# Altium PCB caton-d-q100.PcbDoc
Units mm, origin at the board's own origin, x right, y up, seen from the top; angles counter-clockwise.
Board outline 30.25 x 23.45 mm, 6 copper layers (Signal Layer 1, Signal Layer 2, Signal Layer 3, Signal Layer 4, Signal Layer 5, Signal Layer 6), stack 1.539 mm thick; 17 components, 32 nets, 209 pads, 181 vias.
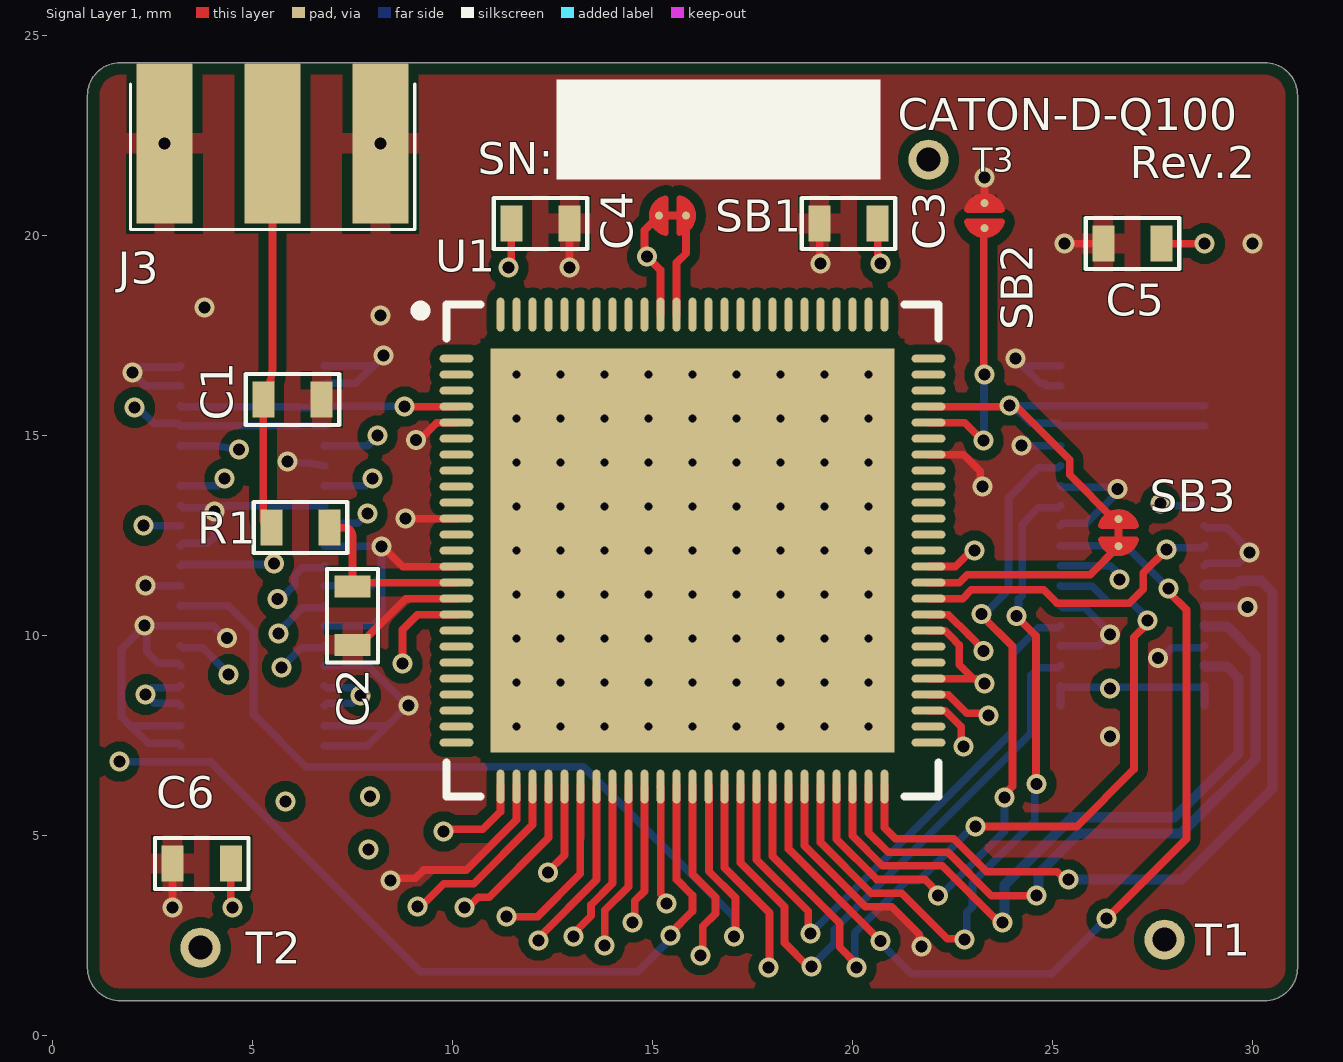
[diagram p0: Signal Layer 1 view]
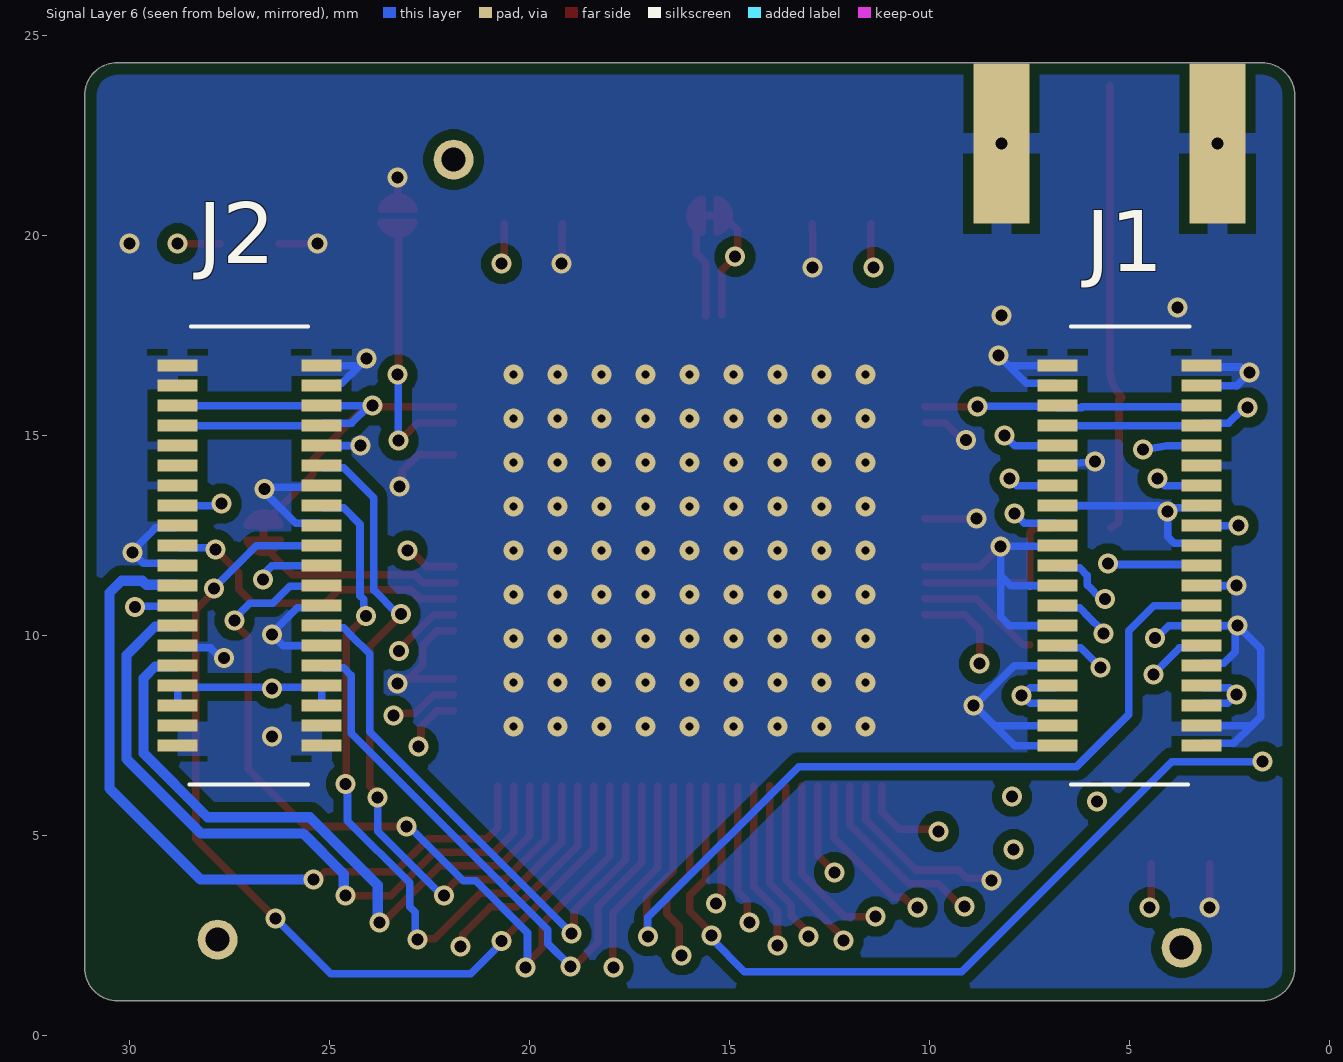
[diagram p1: Signal Layer 6 view, seen from below]
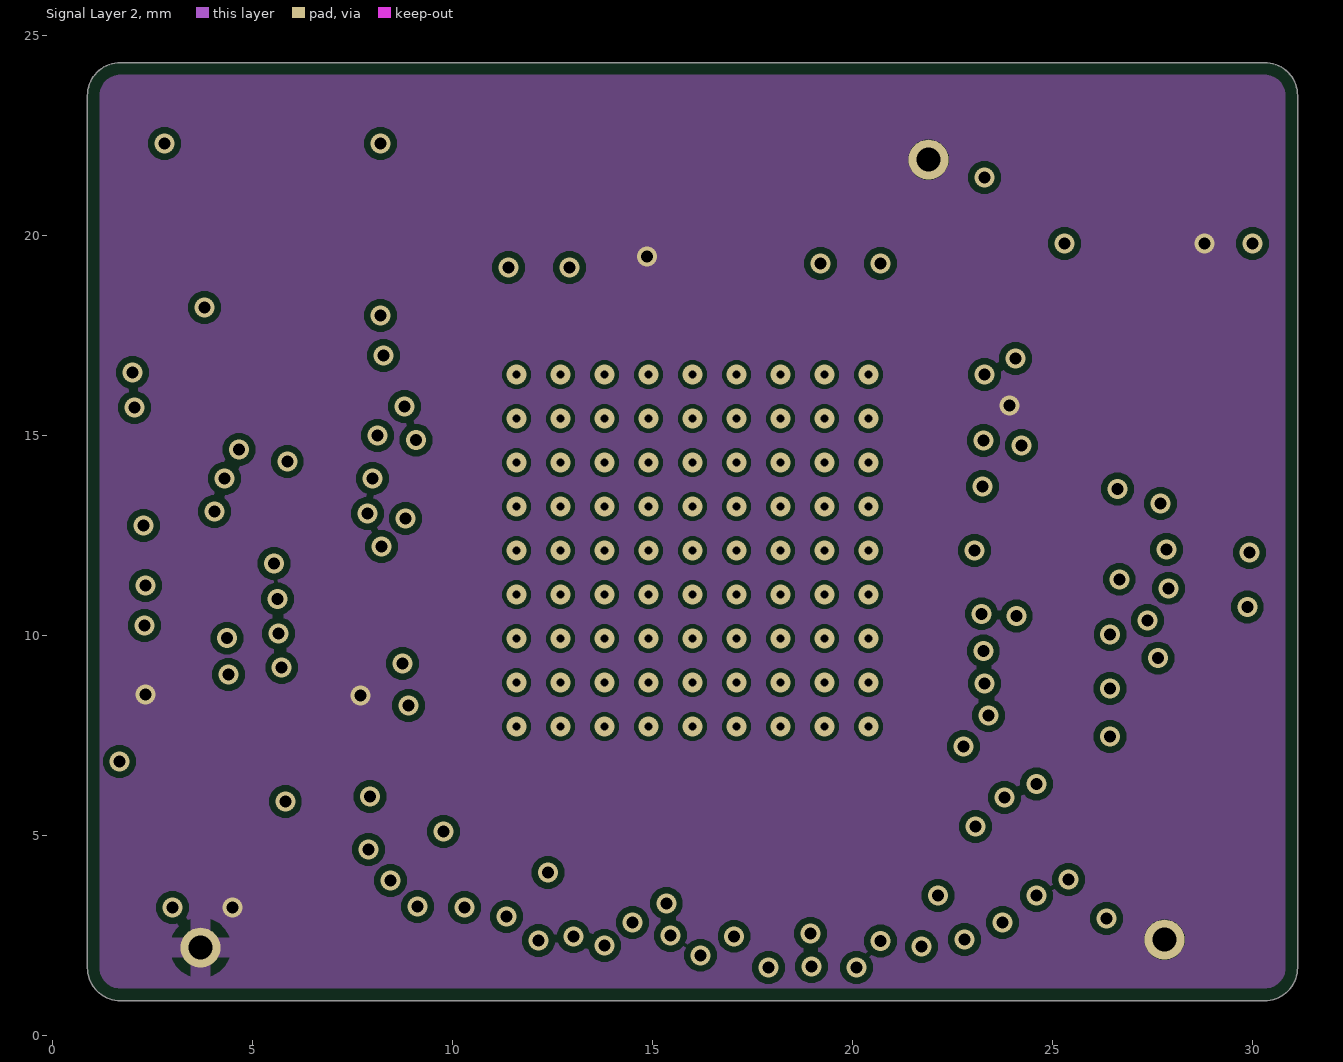
[diagram p2: Signal Layer 2]
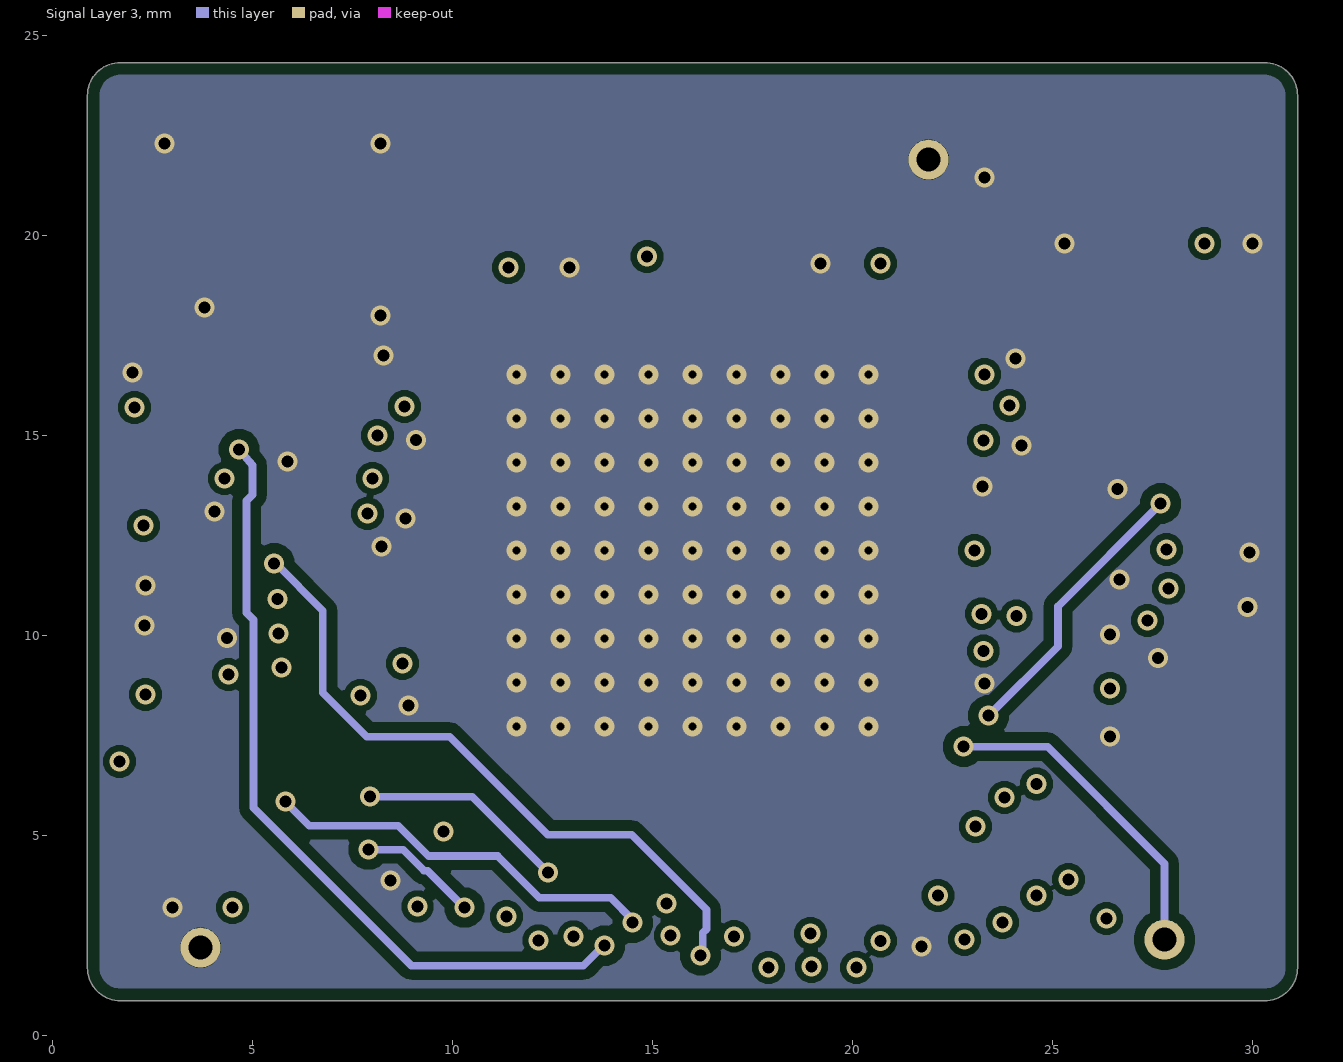
[diagram p3: Signal Layer 3]
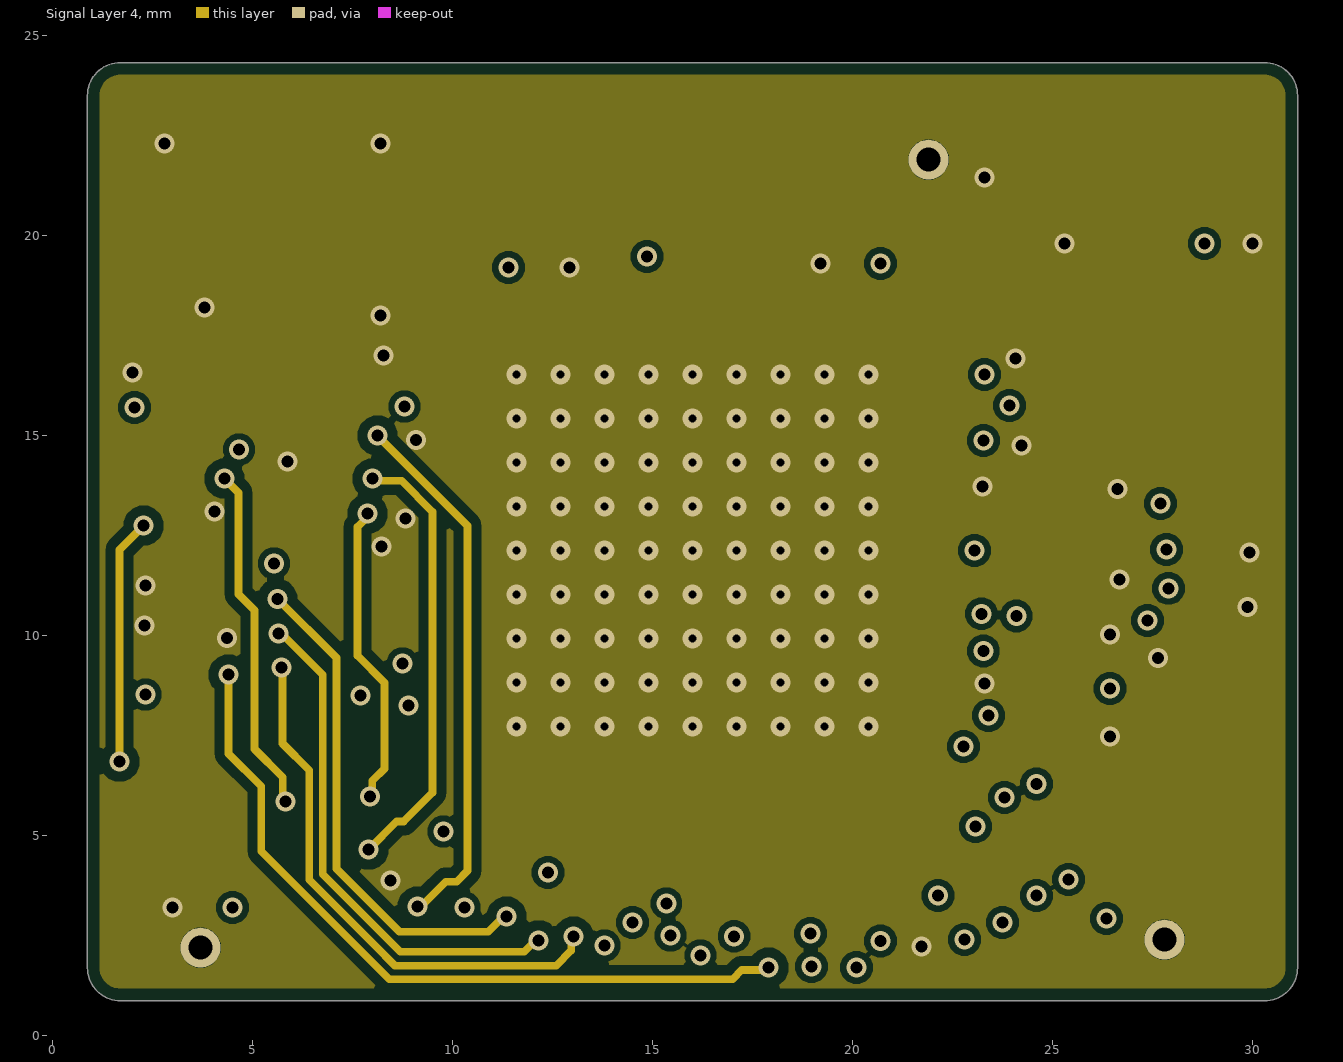
[diagram p4: Signal Layer 4]
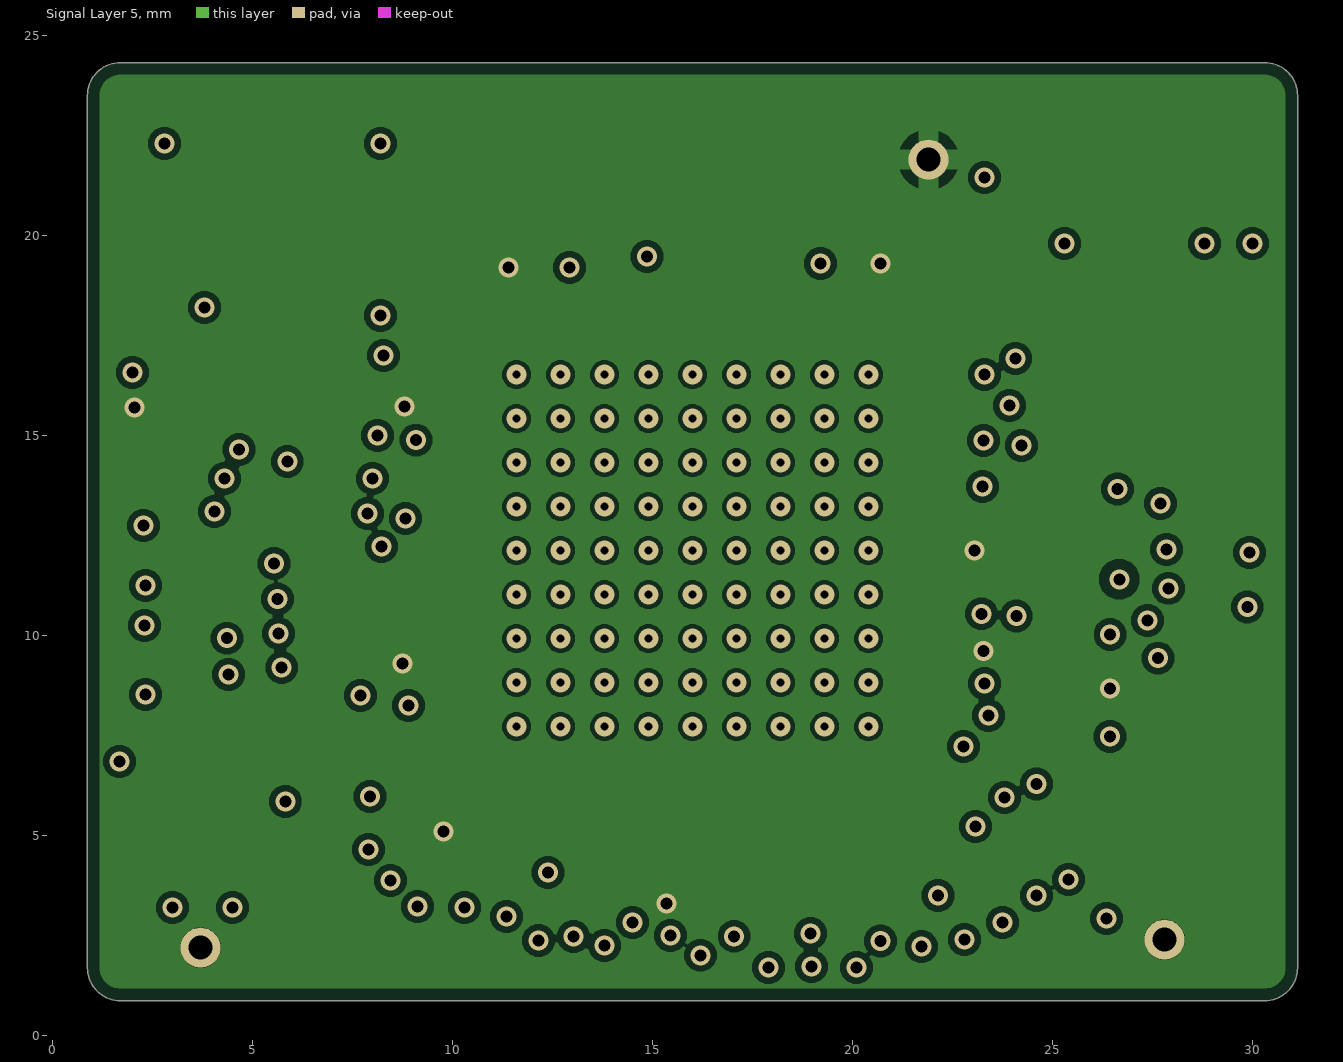
[diagram p5: Signal Layer 5]
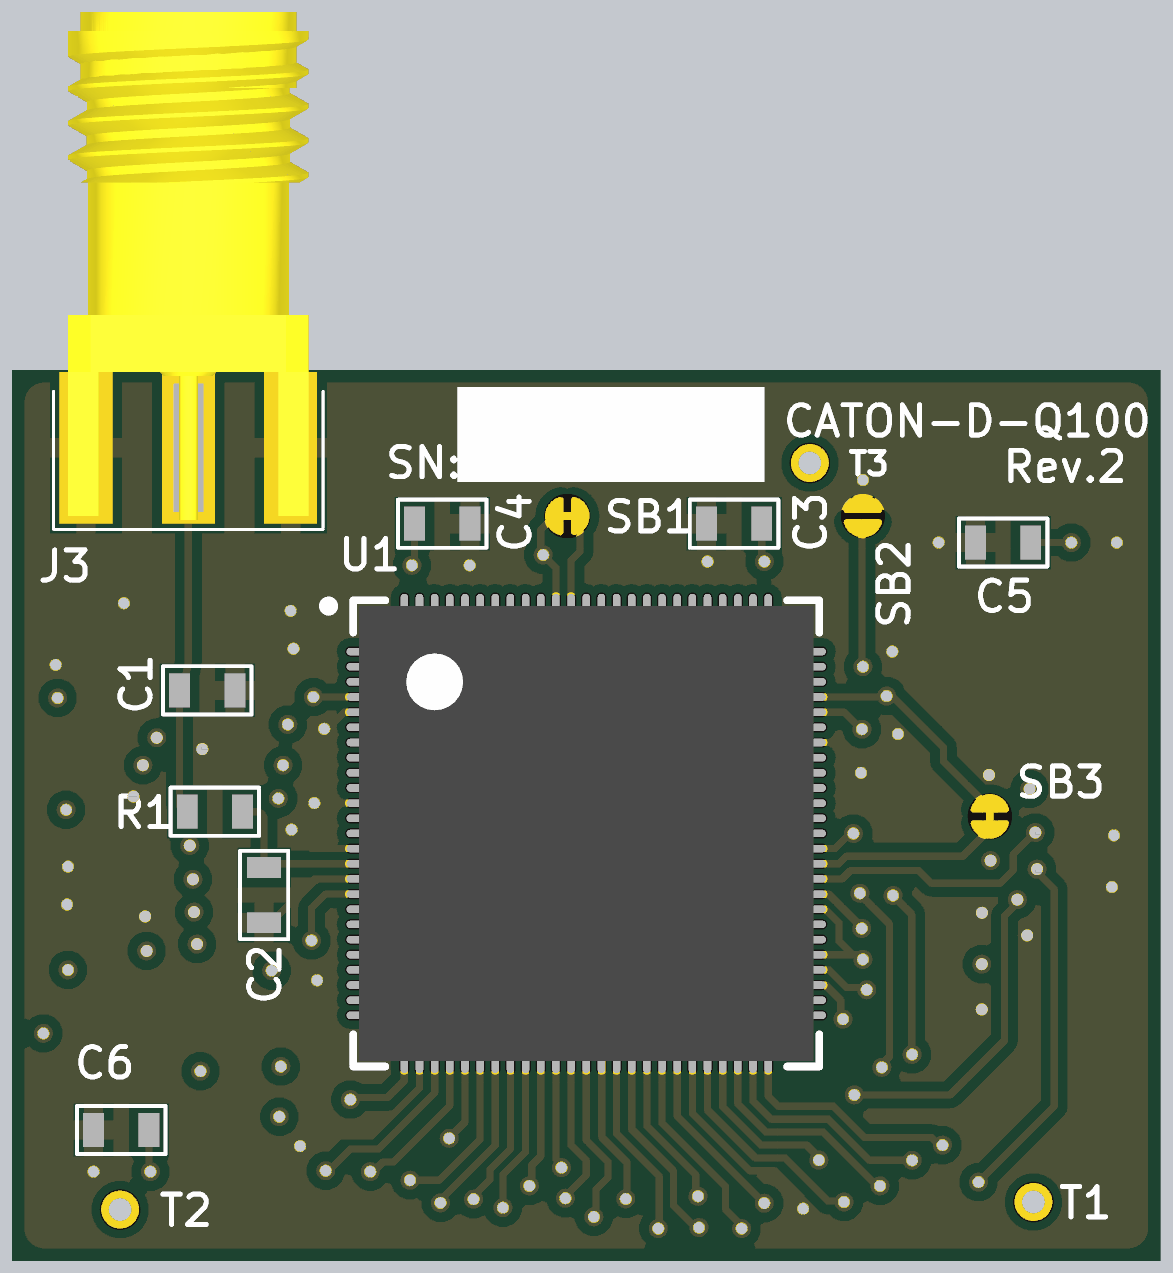
[diagram p6: 3D render of the assembled board from above, using the file's embedded part models]

## Layer stack, top to bottom
Top Mask: solder mask 0.0305, Solder Resist, Dk 3.8
Signal Layer 1: signal copper 0.035
Prepreg 1: prepreg 0.0994, 1080 RC69% 3.39mil, Dk 3.92
Signal Layer 2: signal copper 0.0152
Core 1: core 0.55, 0.25mm H/HOZ without copper, Dk 4.8
Signal Layer 3: signal copper 0.0152
Prepreg 2: prepreg 0.1088, 2313 RC58% 4.09mil, Dk 4.25
Signal Layer 4: signal copper 0.0152
Core 2: core 0.55, 0.25mm H/HOZ without copper, Dk 4.8
Signal Layer 5: signal copper 0.0152
Dielectric 4: prepreg 0.0994, 1080 RC69% 3.39mil, Dk 3.92
Signal Layer 6: signal copper 0.035
Board Layer Stack Bottom Solder: solder mask 0.0305, Solder Resist, Dk 3.8

## Board outline
0.873,1.699 ccw(c1.7,1.7) 1.7,0.873 30.3,0.873 30.301,0.873 ccw(c30.3,1.7) 31.127,1.7 31.127,23.5 31.127,23.501 ccw(c30.3,23.5) 30.3,24.327 1.7,24.327 1.699,24.327 ccw(c1.7,23.5) 0.873,23.5

## Design rules (kind name [scope] priority, off if disabled: settings)
BoardOutlineClearance [All] p1: gap=0.3 ignorepadtopadclearanceinfootprint=FALSE
Clearance SolderBridgeClearance [HasFootprint('Solderbridge')] p1: gap=0.254 ignorepadtopadclearanceinfootprint=TRUE except(0.13: SMDPad-Via THPad-Via; 0.15: Arc-Arc Arc-Track Arc-SMDPad Arc-Region Track-Track Track-SMDPad SMDPad-SMDPad Region-Region; 0.2: Arc-Hole Track-Hole SMDPad-Fill SMDPad-Poly SMDPad-Region THPad-Fill THPad-Poly THPad-Region THPad-Hole Fill-Fill Fill-Poly Fill-Region Fill-Hole Poly-Poly Poly-Region Poly-Hole Region-Hole Text-Hole; 0.33: Arc-THPad Track-THPad; 0.508: SMDPad-THPad THPad-THPad)
Clearance [All] p2: gap=0.254 ignorepadtopadclearanceinfootprint=TRUE except(0.13: SMDPad-Via THPad-Via; 0.15: Arc-Arc Arc-Track Arc-SMDPad Track-Track Track-SMDPad SMDPad-SMDPad; 0.2: Arc-Hole Track-Hole SMDPad-Fill SMDPad-Poly SMDPad-Region THPad-Fill THPad-Poly THPad-Region THPad-Hole Fill-Fill Fill-Poly Fill-Region Fill-Hole Poly-Poly Poly-Region Poly-Hole Region-Region Region-Hole Text-Hole; 0.33: Arc-THPad Track-THPad; 0.508: SMDPad-THPad THPad-THPad)
Creepage [All] p1: checkdistance=0.254 applytopolygonpour=TRUE
DiffPairsRouting ControlledDiffPairsRouting [All] p1: maxlimit=0.508 minlimit=0.254 mostfreqgap=0.508 toplayer_maxgap=0.254 toplayer_prefgap=0.254 toplayer_minwidth=0.104 toplayer_maxwidth=0.104 toplayer_prefwidth=0.104 midlayer1_mingap=0.508 midlayer1_minwidth=0.096 midlayer1_maxwidth=0.096 midlayer1_prefwidth=0.096 midlayer4_minwidth=0.381 midlayer4_maxwidth=0.381 midlayer4_prefwidth=0.381 midlayer5_mingap=0.508 midlayer5_minwidth=0.096 midlayer5_maxwidth=0.096 midlayer5_prefwidth=0.096 midlayer8_mingap=0.508 midlayer8_minwidth=0.091 midlayer8_maxwidth=0.091 midlayer8_prefwidth=0.091 bottomlayer_maxgap=0.254 bottomlayer_prefgap=0.254 bottomlayer_minwidth=0.104 bottomlayer_maxwidth=0.104 bottomlayer_prefwidth=0.104 maxuncoupledlength=12.7
DiffPairsRouting [All] p2: maxlimit=0.254 minlimit=0.127 mostfreqgap=0.254 toplayer_minwidth=0.089 toplayer_maxwidth=0.381 toplayer_prefwidth=0.381 midlayer1_minwidth=0.089 midlayer1_maxwidth=0.381 midlayer1_prefwidth=0.381 midlayer4_minwidth=0.089 midlayer4_maxwidth=0.381 midlayer4_prefwidth=0.381 midlayer5_minwidth=0.089 midlayer5_maxwidth=0.381 midlayer5_prefwidth=0.381 midlayer8_minwidth=0.089 midlayer8_maxwidth=0.381 midlayer8_prefwidth=0.381 bottomlayer_minwidth=0.089 bottomlayer_maxwidth=0.381 bottomlayer_prefwidth=0.381 maxuncoupledlength=12.7
FanoutControl Fanout_BGA [IsBGA] p1: bgadir=Out bgaviamode=Centered fanoutstyle=UnderPads fanoutdirection=Alternating viagrid=0.025 // Fanout_BGA (Default Rule)
FanoutControl Fanout_Default [All] p5: bgadir=Out bgaviamode=Closest fanoutstyle=Auto fanoutdirection=Alternating viagrid=0.025 // Fanout_Default (Default Rule)
Height [All] p1: minheight=0 maxheight=8.48 prefheight=4.24
HoleSize [All] p1: absolutevalues=TRUE maxlimit=6.3 minlimit=0.15 maxpercent=80.000 minpercent=20.000
HoleToHoleClearance [All] p1: gap=0.5 allowstackedmicrovias=FALSE
Length [All] p1: maxlimit=2540 minlimit=0
MinimumAnnularRing [All] p1: minimumring=0.075
MinimumSolderMaskSliver [All] p1: minsoldermaskwidth=0.123
PlaneClearance [All] p1: clearance=0.254
PlaneConnect [All] p1: pad.planeconnectstyle=Relief pad.reliefexpansion=0.508 pad.reliefentries=4 pad.reliefconductorwidth=0.254 pad.reliefairgap=0.254 via.planeconnectstyle=Direct via.reliefexpansion=0.508 via.reliefentries=4 via.reliefconductorwidth=0.254 via.reliefairgap=0.254
PolygonConnect PolygonConnectRFPads [(InComponentClass('RF Components')) vs InNet('GND')] p1: connectstyle=Direct reliefconductorwidth=0.508 reliefentries=4 polygonreliefangle="90 Angle" airgapwidth=0.254
PolygonConnect PolygonConnectDefault [All] p2: thpad.connectstyle=Relief thpad.reliefconductorwidth=0.508 thpad.reliefentries=4 thpad.polygonreliefangle="90 Angle" thpad.airgapwidth=0.254 smdpad.connectstyle=Relief smdpad.reliefconductorwidth=0.508 smdpad.reliefentries=4 smdpad.polygonreliefangle="90 Angle" smdpad.airgapwidth=0.254 via.connectstyle=Direct via.reliefconductorwidth=0.508 via.reliefentries=4 via.polygonreliefangle="90 Angle" via.airgapwidth=0.254
RoutingCorners ControlCorners [InNetClass('Controlled Impedance')] p1: cornerstyle=Round minsetback=2.54 maxsetback=2.54
RoutingCorners [All] p2: cornerstyle=45-Degree minsetback=2.54 maxsetback=2.54
RoutingPriority ControlPriority [All] p1: routingpriority=3
RoutingPriority PowerPriority [InNetClass('Power')] p2: routingpriority=2
RoutingVias [All] p1: holewidth=0.15 width=0.25 viastyle="Through Hole" minholewidth=0.15 minwidth=0.25 maxholewidth=1 maxwidth=2 useviatemplates=TRUE viatemplateguid#1={6E16A108-EE77-40FA-BB0C-82DB9959CCC9} viatemplatename#1=v50h30m0mx0
SilkToSilkClearance [All] p1: silktosilkclearance=0.1
SilkToSolderMaskClearance [IsPad] p1: minsilkscreentomaskgap=0.025 clearancetoexposedcopper=TRUE
SolderMaskExpansion BGASolderMaskExpansion [ViaDiameter <= 0.5] p1: expansion=0.102 istentingtop=TRUE
SolderMaskExpansion [All] p2: expansion=0.038 istentingtop=FALSE
SupplyNets "Schematic Supply Nets" [InNet('GND')] p1: voltage=0.000
SupplyNets "Schematic Supply Nets_6" [InNet('+1.8V_SCUM')] p2: voltage=0.000
SupplyNets "Schematic Supply Nets_4" [InNet('+1.1V_SCUM')] p3: voltage=0.000
UnRoutedNet [All] p1: checkbadconnections=TRUE
ViasUnderSMD [All] p1: allowed=TRUE
Width ControlWidth [InNetClass('Controlled Impedance') AND NOT(InAnyDifferentialPair)] p1: maxlimit=0.122 minlimit=0.092 preferedwidth=0.097 toplayer_minwidth=0.122 toplayer_prefwidth=0.122 midlayer1_minwidth=0.097 midlayer1_maxwidth=0.097 midlayer5_minwidth=0.097 midlayer5_maxwidth=0.097 midlayer8_maxwidth=0.092 midlayer8_prefwidth=0.092 bottomlayer_minwidth=0.122 bottomlayer_prefwidth=0.122 minimp=50.000000 maximp=50.000000 favimp=50.000000
Width BGARoomWidth [WithinRoom('BGARoom')] p2: maxlimit=0.13 minlimit=0.089 preferedwidth=0.127 toplayer_minwidth=0.13 toplayer_prefwidth=0.13 midlayer1_maxwidth=0.127 midlayer4_maxwidth=0.127 midlayer5_maxwidth=0.127 midlayer8_maxwidth=0.127 bottomlayer_minwidth=0.13 bottomlayer_prefwidth=0.13 minimp=50.000000 maximp=50.000000 favimp=50.000000
Width PowerWidth [InNetClass('Power')] p3: maxlimit=2.54 minlimit=0.089 preferedwidth=0.254 toplayer_minwidth=0.13 bottomlayer_minwidth=0.13 minimp=50.000000 maximp=50.000000 favimp=50.000000
Width [All] p4: maxlimit=2.54 minlimit=0.089 preferedwidth=0.254 toplayer_minwidth=0.13 bottomlayer_minwidth=0.13 minimp=50.000000 maximp=50.000000 favimp=50.000000
16 further rules are at their usual default settings.

## Components (designator, comment, footprint, x,y, rotation, side; value= is the part's Value field where it differs from the comment)
C1 "NP" 0603 6,15.9 r180 top
C2 "NP" 0603 7.5,10.5 r90 top
C3 "1 uF" 0603 19.9,20.3 r0 top
C4 "100 nF" 0603 12.2,20.3 r180 top
C5 "1 uF" 0603 27,19.8 r0 top
C6 "100 nF" 0603 3.73,4.3 r0 top
J1 "53885-0408" 538850408 5,12 r270 bottom locked
J2 "53885-0408" 538850408 27,12 r90 bottom locked
J3 "SMA-EDGE" RF2-143-T-17-50-G 5.5,24.3 r180 top
R1 "0" 0603 6.2,12.7 r0 top
SB1 "Shorted" Solderbridge_Shorted 15.5,20.5 r0 top net-tie
SB2 "Solderbridge" Solderbridge 23.3,20.5 r90 top
SB3 "Shorted" Solderbridge_Shorted 26.65,12.575 r90 top net-tie
T1 "TP_VIA" TP_VIA_1MM 27.8,2.4 r0 top
T2 "TP_VIA" TP_VIA_1MM 3.7,2.2 r0 top
T3 "TP_VIA" TP_VIA_1MM 21.9,21.9 r0 top
U1 "SCuM-3C" QFN40P1200X1200X100_HS-101N 16,12.125 r0 top locked

## Footprints (in the part's own frame and the unit in brackets; to place one, negate y for a bottom-side part, rotate by r counter-clockwise, add the part's x,y. Pads: shape width x height; smd on the part's side, far side on the other; paste and mask are expansions set on the pad)
0603 [mm]
  rect 0.55x0.9 smd mask+0: 1(-0.73,0) 2(0.73,0)
  silkscreen extent -1.17,-0.64 1.17,0.64, body extent -0.76,-0.38 0.76,0.38, height 0.79
538850408 [mm]
  rect 0.3x1 smd: 1(-4.75,-1.8) 2(-4.75,1.8) 3(-4.25,-1.8) 4(-4.25,1.8) 5(-3.75,-1.8) 6(-3.75,1.8) 7(-3.25,-1.8) 8(-3.25,1.8) 9(-2.75,-1.8) 10(-2.75,1.8) 11(-2.25,-1.8) 12(-2.25,1.8) 13(-1.75,-1.8) 14(-1.75,1.8) 15(-1.25,-1.8) 16(-1.25,1.8) 17(-0.75,-1.8) 18(-0.75,1.8) 19(-0.25,-1.8) 20(-0.25,1.8) 21(0.25,-1.8) 22(0.25,1.8) 23(0.75,-1.8) 24(0.75,1.8) 25(1.25,-1.8) 26(1.25,1.8) 27(1.75,-1.8) 28(1.75,1.8) 29(2.25,-1.8) 30(2.25,1.8) 31(2.75,-1.8) 32(2.75,1.8) 33(3.25,-1.8) 34(3.25,1.8) 35(3.75,-1.8) 36(3.75,1.8) 37(4.25,-1.8) 38(4.25,1.8) 39(4.75,-1.8) 40(4.75,1.8)
  silkscreen extent -5.72,-1.46 5.72,1.5, body extent -5.72,-2.1 5.72,2.1, height 1.58
QFN40P1200X1200X100_HS-101N [mm] "QFN, 100-Leads, Body 12.00x12.00mm, Pitch 0.40mm, Thermal Pad 10.10x10.10mm, IPC Medium Density"
  oval 0.85x0.2 smd: 1(-5.9,4.8) 2(-5.9,4.4) 3(-5.9,4) 4(-5.9,3.6) 5(-5.9,3.2) 6(-5.9,2.8) 7(-5.9,2.4) 8(-5.9,2) 9(-5.9,1.6) 10(-5.9,1.2) 11(-5.9,0.8) 12(-5.9,0.4) 13(-5.9,0) 14(-5.9,-0.4) 15(-5.9,-0.8) 16(-5.9,-1.2) 17(-5.9,-1.6) 18(-5.9,-2) 19(-5.9,-2.4) 20(-5.9,-2.8) 21(-5.9,-3.2) 22(-5.9,-3.6) 23(-5.9,-4) 24(-5.9,-4.4) 25(-5.9,-4.8) 51(5.9,-4.8) 52(5.9,-4.4) 53(5.9,-4) 54(5.9,-3.6) 55(5.9,-3.2) 56(5.9,-2.8) 57(5.9,-2.4) 58(5.9,-2) 59(5.9,-1.6) 60(5.9,-1.2) 61(5.9,-0.8) 62(5.9,-0.4) 63(5.9,0) 64(5.9,0.4) 65(5.9,0.8) 66(5.9,1.2) 67(5.9,1.6) 68(5.9,2) 69(5.9,2.4) 70(5.9,2.8) 71(5.9,3.2) 72(5.9,3.6) 73(5.9,4) 74(5.9,4.4) 75(5.9,4.8)
  oval 0.2x0.85 smd: 26(-4.8,-5.9) 27(-4.4,-5.9) 28(-4,-5.9) 29(-3.6,-5.9) 30(-3.2,-5.9) 31(-2.8,-5.9) 32(-2.4,-5.9) 33(-2,-5.9) 34(-1.6,-5.9) 35(-1.2,-5.9) 36(-0.8,-5.9) 37(-0.4,-5.9) 38(0,-5.9) 39(0.4,-5.9) 40(0.8,-5.9) 41(1.2,-5.9) 42(1.6,-5.9) 43(2,-5.9) 44(2.4,-5.9) 45(2.8,-5.9) 46(3.2,-5.9) 47(3.6,-5.9) 48(4,-5.9) 49(4.4,-5.9) 50(4.8,-5.9) 76(4.8,5.9) 77(4.4,5.9) 78(4,5.9) 79(3.6,5.9) 80(3.2,5.9) 81(2.8,5.9) 82(2.4,5.9) 83(2,5.9) 84(1.6,5.9) 85(1.2,5.9) 86(0.8,5.9) 87(0.4,5.9) 88(0,5.9) 89(-0.4,5.9) 90(-0.8,5.9) 91(-1.2,5.9) 92(-1.6,5.9) 93(-2,5.9) 94(-2.4,5.9) 95(-2.8,5.9) 96(-3.2,5.9) 97(-3.6,5.9) 98(-4,5.9) 99(-4.4,5.9) 100(-4.8,5.9)
  rect 10.1x10.1 smd: 101(0,0)
  silkscreen extent -6.92,-6.15 6.15,6.15, body extent -6,-6 6,6, height 1
RF2-143-T-17-50-G [mm]
  rect 1.4x4 smd paste-0.305 mask+0: 1(0,2)
  rect 1.4x4 smd far side paste-0.7 mask+0: 2(-2.7,2) 5(2.7,2)
  rect 1.4x4 smd paste-0.7 mask+0: 3(-2.7,2) 4(2.7,2)
  silkscreen extent -3.56,0.51 3.56,4.15, body extent -3.17,-9.5 3.18,3.9, height 3.82
Solderbridge [mm]
  round 0.2 smd paste-10: 1(-0.312,0) 2(0.312,0)
  Signal Layer 1 region: 0.077,0.432 0.152,0.505 0.271,0.467 0.335,0.424 0.409,0.351 0.462,0.292 0.521,0.193 0.549,0.099 0.544,-0.122 0.518,-0.193 0.434,-0.33 0.351,-0.411 0.259,-0.469 0.157,-0.5 0.107,-0.483 0.077,-0.43
  Signal Layer 1 region: -0.077,-0.432 -0.152,-0.505 -0.271,-0.467 -0.335,-0.424 -0.409,-0.351 -0.462,-0.292 -0.521,-0.193 -0.549,-0.099 -0.544,0.122 -0.518,0.193 -0.434,0.33 -0.351,0.411 -0.259,0.469 -0.157,0.5 -0.107,0.483 -0.077,0.43
  Signal Layer 1 lines w0.152: -0.153,0.431 ccw(c-0.042,0) -0.486,0.021 ccw(c-0.042,0) -0.312,-0.353 ccw(c-0.042,0) -0.153,-0.431 ; 0.153,0.431 cw(c0.042,0) 0.383,0.286 cw(c0.042,0) 0.487,0 cw(c0.042,0) 0.478,-0.088 cw(c0.042,0) 0.153,-0.431
Solderbridge_Shorted [mm]
  round 0.2 smd paste-10: 1(-0.338,0) 2(0.338,0)
  Signal Layer 1 region: -0.102,-0.432 -0.178,-0.505 -0.296,-0.467 -0.361,-0.424 -0.434,-0.351 -0.488,-0.292 -0.546,-0.193 -0.574,-0.099 -0.569,0.122 -0.544,0.193 -0.46,0.33 -0.376,0.411 -0.284,0.469 -0.183,0.5 -0.132,0.483 -0.102,0.43
  Signal Layer 1 region: 0.102,0.432 0.178,0.505 0.296,0.467 0.361,0.424 0.434,0.351 0.488,0.292 0.546,0.193 0.574,0.099 0.569,-0.122 0.544,-0.193 0.46,-0.33 0.376,-0.411 0.284,-0.469 0.183,-0.5 0.132,-0.483 0.102,-0.43
  Signal Layer 1 lines w0.152: -0.178,-0.431 cw(c-0.068,0) -0.178,0.431 ; 0.178,-0.431 ccw(c0.068,0) 0.178,0.431
  Signal Layer 1 lines w0.203: -0.338,0 0.338,0
TP_VIA_1MM [mm]
  round 1 hole 0.6: 1(0,0)

## Part data
C1 C2 C3 C4 C5 C6: library part C0603, "Capacitor, 0603, X5R, ±10%", Manufacturer=N.A., Part Number=C0603-4µ7, Part number IPS=00000007783, Artikkelnr Noca=20069060, Author=rsk, Component Class=Capacitors, ComponentLink1Description=Datasheet, ComponentLink1URL=N.A., ComponentLink2Description="Supplier link", ComponentLink2URL=N.A., Footprint Doc=0603, HelpURL=N.A., LatestRevisionDate=2009-11-23, Manufacturer Part Number=N.A., Note=6.3V, Pad Count=2, Part number Norautron=N.A., PartId=100200274, Published=2009-05-08, Supplier 1=N.A., Supplier 2=N.A., Supplier Part Number 1=N.A., Supplier Part Number 2=N.A.
J1 J2: "0.50mm Pitch SlimStack Plug, Surface Mount, Dual Row, Vertical, 2.50mm Stack Height, without Solder Tab, 40 Circuits", Manufacturer_Name=Molex, Mouser Part Number=538-53885-0408, Datasheet Link=https://componentsearchengine.com/Datasheets/1/53885-0408.pdf, Height=1.68mm, Manufacturer_Part_Number=53885-0408, Mouser Price/Stock=https://www.mouser.co.uk/ProductDetail/Molex/53885-0408?qs=OdNwOVlk5%2FhjFAQwfbus0w%3D%3D, System=Connector
J3: "Non-Magnetic / CONN SMA JACK STR 50OHM EDGE MNT"
R1: library part R0603, "Resistor, 0603", Manufacturer=N.A., Part Number=R0201-10k, Part number IPS=00000001255, Artikkelnr Noca=N.A., Author=rsk, Component Class=Resistors, ComponentLink1Description=Datasheet, ComponentLink1URL=N.A., ComponentLink2Description="Supplier link", ComponentLink2URL=N.A., Footprint Doc=0201, HelpURL=N.A., LatestRevisionDate=2014-11-13, Manufacturer Part Number=N.A., Note="Chip Res 1%", Pad Count=2, Part number Norautron=N.A., PartId=100100065, Published=2014-11-13, Supplier 1=N.A., Supplier 2=N.A., Supplier Part Number 1=N.A., Supplier Part Number 2=N.A.
SB1 SB3: library part "Solderbridge Shorted", "Shorted Solderbridge", Manufacturer=N.A., Artikkelnr Noca=N.A., Author=rsk, Component Class=Connectors, ComponentLink1Description=Datasheet, ComponentLink1URL=N.A., ComponentLink2Description="Supplier link", ComponentLink2URL=N.A., Footprint Doc=Solderbridge_Shorted, HelpURL=N.A., LatestRevisionDate=2012-08-07, Manufacturer Part Number=N.A., Note=N.A., Pad Count=2, Part Number="Solderbridge Shorted", Part number IPS=N.A., Part number Norautron=N.A., PartId=100500459, Published=2012-08-07, Supplier 1=N.A., Supplier 2=N.A., Supplier Part Number 1=N.A., Supplier Part Number 2=N.A.
SB2: Manufacturer=N.A., Artikkelnr Noca=N.A., Author=rsk, Component Class=Connectors, ComponentLink1Description=Datasheet, ComponentLink1URL=N.A., ComponentLink2Description="Supplier link", ComponentLink2URL=N.A., Footprint Doc=Solderbridge, HelpURL=N.A., LatestRevisionDate=2009-12-14, Manufacturer Part Number=N.A., Note=N.A., Pad Count=2, Part Number=Solderbridge, Part number IPS=N.A., Part number Norautron=N.A., PartId=100500458, Published=2009-12-14, Supplier 1=N.A., Supplier 2=N.A., Supplier Part Number 1=N.A., Supplier Part Number 2=N.A.
T1 T2 T3: "Test point 1 pin"

## Via types
v1: diameter 0.5, hole 0.3, Signal Layer 1 to Signal Layer 6, tented both sides, 100 vias
v2: diameter 0.5, hole 0.2, Signal Layer 1 to Signal Layer 6, tented both sides, 81 vias

## Nets (pads, with @x,y where several pads share a name; then routed paths per layer and width w, separated by ;. In a path a pad name is that pad's centre, name@x,y a point inside that pad or via, vN(x,y) a via of type N, cw(c..) or ccw(c..) an arc to the next point about the centre after c; other vN are vias at no path point)
3WB_CLK: J2.10 U1.48 | length 16.9
  Signal Layer 1 w0.191: U1.48@20.004,6.239 20,6.234 20,4.992 20.748,4.244 22.246,4.244 23.51,2.98 ; 23.511,2.98 23.666,2.825 v1(23.75,2.825)
  Signal Layer 6 w0.254: v1(23.75,2.825) 23.797,2.872 23.797,3.761 23.969,3.933 25.495,5.459 28.051,5.459 29.65,7.058 29.65,8.942 29.365,9.227 28.823,9.227 J2.10
3WB_DATA: J2.18 U1.50 | length 19
  Signal Layer 1 w0.191: U1.50@20.8,6.25 20.8,5.2 21.075,4.925 22.528,4.925 23.353,4.1 25.116,4.1 25.316,3.9 v1(25.4,3.9)
  Signal Layer 6 w0.254: v1(25.4,3.9) 28.225,3.9 30.5,6.175 30.5,11.076 30.203,11.373 29.681,11.373 29.581,11.273 28.823,11.273 J2.18
3WB_ENB: J2.14 U1.49 | length 17.4
  Signal Layer 1 w0.191: U1.49@20.4,6.25 20.4,5.074 20.889,4.585 22.387,4.585 23.472,3.5 v1(24.6,3.5)
  Signal Layer 6 w0.254: v1(24.6,3.5) 24.647,3.547 24.647,4.039 25.663,5.055 28.218,5.055 30.075,6.912 30.075,9.517 29.365,10.227 28.823,10.227 J2.14
+1.1V_SCUM: C5.2 C6.2 J1.33 J1.34 J1.35 J1.36 J2.33 J2.34 J2.35 J2.36 SB1.1 SB3.2 T2.1 U1.72 U1.90 | length 24.9
  Signal Layer 1 w0.191: C6.2 4.46,3.34 4.5,3.3 v1(4.5,3.2) ; SB1.1 14.8,20.138 14.8,19.539 v1(14.864,19.475) 15.2,19.139 U1.90 ; U1.72 23.9,15.725 v1(23.925,15.75) 23.984,15.691 24.132,15.691 25.426,14.396 25.426,14.021 26.535,12.913 SB3.2 ; C5.2 v1(28.8,19.8)
  Signal Layer 6 w0.191: J1.36 3.145,8.305 2.545,8.305 v1(2.325,8.525) 2.495,8.695 3.145,8.695 J1.34 ; J1.35 6.855,8.305 7.48,8.305 7.679,8.504 v1(7.699,8.504) ; J1.33 6.855,8.695 7.48,8.695 v1@7.675,8.5 ; v1(23.925,15.75) v1@24.009,15.75 ; J2.34 J2.33 25.145,15.305 24.454,15.305 v1@24.009,15.75 ; J2.36 J2.35 v1@24.009,15.75
+1.8V_SCUM: C3.2 C4.2 J1.5 J1.6 J1.7 J1.8 J2.5 J2.6 J2.7 J2.8 T3.1 U1.4 U1.17 U1.26 U1.36 U1.59 U1.62 | length 29.4
  Signal Layer 1 w0.191: v1@8.75,9.3 8.75,10.15 9.125,10.525 U1.17 U1.17@10.125,10.525 ; v1(8.8,15.725) U1.4 U1.4@10.125,15.725 ; v1(9.775,5.102) 9.832,5.159 10.759,5.159 11.198,5.598 U1.26@11.198,6.248 ; v1(11.4,19.2) 11.47,19.27 C4.2 ; U1.36 15.202,6.223 15.202,3.535 15.346,3.392 v1(15.346,3.308) ; C3.2 20.63,19.37 v1(20.7,19.3) ; U1.59 21.902,10.523 22.397,10.523 22.913,10.007 22.913,10.005 23.27,9.647 v1(23.27,9.618) ; U1.62 21.902,11.727 22.569,11.727 22.966,12.124 v1(23.05,12.124)
  Signal Layer 6 w0.191: v1(2.05,15.7) 2.05,15.65 2.184,15.65 2.529,15.305 3.145,15.305 J1.8 J1.7 ; J1.6 3.225,15.725 6.196,15.725 ; 6.196,15.7 6.8,15.7 6.837,15.737 8.788,15.737 v1(8.8,15.725) ; J2.5 J2.7 25.237,8.712 26.399,8.712 v1(26.437,8.675) ; v1@26.437,8.712 28.763,8.712 J2.8 J2.6
  other v1: 8.75,9.3
ANT: C1.2 J3.1 R1.1 | length 11.3
  Signal Layer 1 w0.191: C1.2@5.27,15.899 5.265,15.545 5.265,12.905 ccw(c5.456,12.905) 5.29,12.81 R1.1 ; C1.2 cw(c5.27,15.97) 5.2,15.97 ccw(c4.476,16.694) 5.5,16.694 J3.1@5.5,23.75
CLK_SEL: SB1.2 U1.89 | length 2.6
  Signal Layer 1 w0.191: U1.89@15.6,18 15.6,19.324 15.838,19.562 SB1.2
GND: C1.1 C2.1 C3.1 C4.1 C5.1 C6.1 J1.1 J1.2 J1.3 J1.4 J1.11 J1.12 J1.15 J1.16 J1.19 J1.20 J1.23 J1.24 J1.27 J1.28 J1.31 J1.32 J1.37 J1.38 J1.39 J1.40 J2.1 J2.2 J2.3 J2.4 J2.11 J2.12 J2.15 J2.16 J2.19 J2.20 J2.23 J2.24 J2.27 J2.28 J2.31 J2.32 J2.37 J2.38 J2.39 J2.40 J3.2 J3.3 J3.4 J3.5 SB2.2 U1.5 U1.11 U1.14 U1.16 U1.27 U1.45 U1.55 U1.58 U1.69 U1.101 | length 79.3
  Signal Layer 1 w0.191: v1(3,3.2) C6.1 ; C2.1 7.675,9.77 8.83,10.925 U1.16@10.125,10.925 ; v1(8.225,12.225) 8.252,12.225 8.752,11.725 U1.14@10.125,11.725 ; v1(8.45,3.875) 8.509,3.934 9.071,3.934 9.276,4.14 10.34,4.14 11.6,5.4 U1.27@11.6,6.25 ; v1(8.825,12.925) U1.11@10.125,12.925 ; v1(9.086,14.886) 9.17,14.886 9.607,15.323 U1.5 U1.5 ; v1(12.925,19.2) 12.925,19.945 C4.1 ; U1.45@18.8,6.25 18.8,4.747 20.325,3.223 20.977,3.223 21.665,2.535 21.665,2.283 v1(21.724,2.224) ; C3.1 19.185,20.285 19.185,19.315 v1(19.2,19.3) ; U1.55 23.022,8.925 22.671,9.276 22.671,9.764 22.572,9.864 22.572,9.866 22.315,10.123 21.902,10.123 U1.58 ; U1.69 22.778,14.525 23.191,14.112 23.191,13.784 v1(23.25,13.725) ; 23.058,8.925 23.175,8.925 v1(23.3,8.8) ; SB2.2 23.3,20.987 v1(23.3,21.45) ; v1(25.3,19.8) C5.1
  Signal Layer 5 w0.191: v1@26.6,11.478 v1(26.669,11.409)
  Signal Layer 6 w0.191: v1(2.325,11.25) J1.24 ; J1.40 3.145,7.305 2.395,7.305 1.95,7.75 ; J1.38 1.95,7.75 ; J1.32 3.145,9.305 2.648,9.305 2.359,9.594 2.359,10.191 v1(2.3,10.25) ; J1.20 3.255,12.305 3.883,12.305 4.051,12.472 v1(4.051,13.1) ; J1.16 3.255,13.195 3.872,13.195 3.967,13.1 v1(4.051,13.1) ; J1.4 2.325,16.25 v1(2,16.575) 2.084,16.575 2.224,16.715 3.165,16.715 J1.2 ; v1(4.36,9.935) 4.34,9.935 4.025,10.25 J1.28 v1(2.3,10.25) ; v1(5.869,14.35) 6.395,14.305 J1.11 ; J1.39 7.872,7.25 8.372,7.75 ; J1.37 8.372,7.75 ; J1.31 7.883,9.25 v1@8.883,8.25 ; J1.27 8.005,10.25 8.224,10.469 8.224,11.499 ; J1.23 7.975,11.25 8.224,11.499 ; J1.19 6.812,12.237 8.213,12.237 v1(8.225,12.225) 8.224,12.224 8.224,11.499 ; J1.15 4.284,13.25 4.135,13.1 v1(4.051,13.1) ; J1.3 6.855,16.305 7.58,16.305 8.025,16.75 ; J1.1 8.025,16.75 ; v1(8.275,17) 8.025,16.75 ; v1(8.899,8.25) v1@8.883,8.25 ; v1(24.075,16.925) v1@24.25,16.75 ; v1(24.225,14.75) J2.31 ; J2.11 26.162,9.75 v1@26.44,10.027 ; J2.15 25.255,10.695 25.805,10.695 26.442,10.058 v1(26.442,10.031) ; J2.19 26.44,11.75 26.6,11.59 26.6,11.49 26.594,11.484 v1(26.669,11.409) ; J2.23 25.255,12.805 25.849,12.805 26.628,13.584 v1(26.628,13.667) 26.586,13.709 25.241,13.709 J2.27 ; J2.37 24.85,16.25 24.795,16.305 24.695,16.305 v1@24.25,16.75 ; J2.39 v1@24.25,16.75 ; v1(27.635,9.435) 27.719,9.435 27.979,9.695 28.745,9.695 J2.12 ; J2.16 28.819,10.731 29.85,10.731 v1(29.869,10.712) ; J2.20 28.855,11.805 29.655,11.805 v1(29.925,12.075) 29.925,12.122 29.352,12.695 28.855,12.695 J2.24 ; 1.95,7.75 1.726,7.974 1.726,9.676 v1(2.3,10.25) ; 8.372,7.75 8.872,8.25 v1@8.883,8.25
  other v1: 26.437,7.481 8.2,18 3.8,18.2 30,19.8 2.8,22.3 8.2,22.3
  other v2: 11.6,7.725 12.7,7.725 13.8,7.725 14.9,7.725 16,7.725 17.1,7.725 18.2,7.725 19.3,7.725 20.4,7.725 11.6,8.825 12.7,8.825 13.8,8.825 14.9,8.825 16,8.825 17.1,8.825 18.2,8.825 19.3,8.825 20.4,8.825 11.6,9.925 12.7,9.925 13.8,9.925 14.9,9.925 16,9.925 17.1,9.925 18.2,9.925 19.3,9.925 20.4,9.925 11.6,11.025 12.7,11.025 13.8,11.025 14.9,11.025 16,11.025 17.1,11.025 18.2,11.025 19.3,11.025 20.4,11.025 11.6,12.125 12.7,12.125 13.8,12.125 14.9,12.125 16,12.125 17.1,12.125 18.2,12.125 19.3,12.125 20.4,12.125 11.6,13.225 12.7,13.225 13.8,13.225 14.9,13.225 16,13.225 17.1,13.225 18.2,13.225 19.3,13.225 20.4,13.225 11.6,14.325 12.7,14.325 13.8,14.325 14.9,14.325 16,14.325 17.1,14.325 18.2,14.325 19.3,14.325 20.4,14.325 11.6,15.425 12.7,15.425 13.8,15.425 14.9,15.425 16,15.425 17.1,15.425 18.2,15.425 19.3,15.425 20.4,15.425 11.6,16.525 12.7,16.525 13.8,16.525 14.9,16.525 16,16.525 17.1,16.525 18.2,16.525 19.3,16.525 20.4,16.525
GPIO0: J1.9 U1.28 | length 19.6
  Signal Layer 1 w0.191: v1(9.125,3.225) 9.209,3.225 9.783,3.799 10.526,3.799 12,5.274 U1.28@12,6.25
  Signal Layer 4 w0.191: v1(8.125,15) 10.374,12.751 10.374,4.119 10.105,3.85 9.833,3.85 9.209,3.225 v1(9.125,3.225)
  Signal Layer 6 w0.191: J1.9 7.875,14.75 v1(8.125,15)
GPIO1: J1.13 U1.29 | length 19.5
  Signal Layer 1 w0.191: v1(10.3,3.2) 10.384,3.2 10.643,3.459 10.914,3.459 12.4,4.945 U1.29@12.4,6.25
  Signal Layer 3 w0.191: v1(7.9,4.65) 8.763,4.65 9.288,4.125 9.375,4.125 v1(10.3,3.2)
  Signal Layer 4 w0.191: v1(7.9,4.65) 8.604,5.354 8.779,5.354 9.499,6.074 9.499,13.099 8.726,13.871 8.054,13.871 v1(8,13.925)
  Signal Layer 6 w0.191: J1.13 7.825,13.75 v1(8,13.925)
GPIO2: J1.17 U1.30 | length 16.4
  Signal Layer 1 w0.191: v1(12.383,4.081) 12.383,4.092 12.8,4.509 U1.30@12.8,6.25
  Signal Layer 3 w0.191: v1(7.94,5.975) 10.489,5.975 v1(12.383,4.081)
  Signal Layer 4 w0.191: v1(7.875,13.05) 7.875,12.966 7.626,12.717 7.626,9.499 8.3,8.825 8.3,6.675 7.998,6.373 7.998,6.033 v1(7.94,5.975)
  Signal Layer 6 w0.191: J1.17 6.855,12.805 7.63,12.805 v1(7.875,13.05)
GPIO3: J1.21 U1.31 | length 18.6
  Signal Layer 1 w0.191: v1(11.35,2.975) 12.125,2.975 13.197,4.047 13.197,4.934 13.2,4.937 U1.31@13.2,6.25
  Signal Layer 4 w0.191: v1(5.621,10.915) 5.632,10.915 7.1,9.447 7.1,4.175 8.674,2.601 10.892,2.601 11.266,2.975 v1(11.35,2.975)
  Signal Layer 6 w0.191: v1(5.621,10.915) 5.704,10.915 6.044,11.255 6.055,11.255 6.055,11.502 6.248,11.695 6.745,11.695 J1.21
GPIO4: J1.25 U1.32 | length 18.7
  Signal Layer 1 w0.191: v1(12.154,2.376) 12.154,2.449 13.6,3.896 U1.32
  Signal Layer 4 w0.191: v1(5.649,10.05) 5.733,10.05 6.76,9.023 6.76,4.034 8.184,2.609 8.693,2.101 11.794,2.101 12.07,2.376 v1(12.154,2.376)
  Signal Layer 6 w0.191: v1(5.649,10.05) 5.649,10.096 6.055,10.501 6.198,10.645 6.249,10.695 6.745,10.695 J1.25
GPIO5: J1.29 U1.33 | length 19
  Signal Layer 1 w0.191: v1(13.026,2.474) 13.026,2.558 13.463,2.996 13.463,3.27 14,3.807 U1.33@14,6.25
  Signal Layer 4 w0.191: v1(5.73,9.205) 5.75,9.186 5.75,7.303 6.419,6.634 6.419,3.893 8.043,2.269 8.562,1.75 12.588,1.75 12.967,2.128 12.967,2.415 v1(13.026,2.474)
  Signal Layer 6 w0.191: v1(5.73,9.205) 6.22,9.695 6.745,9.695 J1.29
GPIO6: J1.10 U1.34 | length 25.5
  Signal Layer 1 w0.191: v1(13.8,2.25) 13.804,2.254 13.804,3.129 14.4,3.725 U1.34@14.4,6.25
  Signal Layer 3 w0.191: v1(4.666,14.651) 5,14.258 5,13.525 4.85,13.375 4.85,10.574 5.025,10.399 5.025,5.7 8.975,1.75 13.273,1.75 13.773,2.25 v1(13.8,2.25)
  Signal Layer 6 w0.191: J1.10 4.035,14.75 cw(c4.035,14.559) 4.065,14.748 v1(4.666,14.651)
GPIO7: J1.14 U1.35 | length 23.4
  Signal Layer 1 w0.191: v1(14.5,2.825) 14.559,2.884 14.559,3.369 14.8,3.61 U1.35
  Signal Layer 3 w0.191: v1(5.82,5.852) 6.423,5.249 8.646,5.249 9.405,4.49 11.127,4.49 12.171,3.445 13.955,3.445 14.5,2.9 v1(14.5,2.825)
  Signal Layer 4 w0.191: v1(4.3,13.925) 4.65,13.575 4.65,11.038 5.05,10.638 5.05,7.165 5.761,6.455 5.761,5.911 v1(5.82,5.852)
  Signal Layer 6 w0.191: J1.14 4.125,13.75 v1(4.3,13.925)
GPIO8: J1.18 U1.37 | length 27.6
  Signal Layer 1 w0.191: v1(15.45,2.5) 15.45,2.565 15.998,3.113 15.998,3.505 15.6,3.904 U1.37@15.6,6.25
  Signal Layer 4 w0.191: v1(1.675,6.85) 1.675,12.15 v1(2.275,12.75)
  Signal Layer 6 w0.191: v1(1.675,6.85) 3.95,6.85 9.199,1.601 14.635,1.601 15.45,2.416 v1(15.45,2.5) ; v1(2.275,12.75) J1.18
GPIO9: J1.22 U1.38 | length 23.8
  Signal Layer 1 w0.191: U1.38@16,6.25 16,4.037 16.574,3.463 16.574,3.047 16.259,2.731 16.259,2.068 v1(16.2,2.009)
  Signal Layer 3 w0.191: v1(5.538,11.805) 5.577,11.805 6.76,10.623 6.76,8.576 7.861,7.475 9.934,7.475 12.384,5.025 14.476,5.025 16.351,3.15 16.351,2.666 16.259,2.574 16.259,2.068 v1(16.2,2.009)
  Signal Layer 6 w0.191: J1.22 3.228,11.778 5.511,11.778 v1(5.538,11.805)
GPIO10: J1.26 U1.39 | length 22.8
  Signal Layer 1 w0.191: U1.39@16.411,6.239 16.411,4.107 17.075,3.443 17.075,2.516 v1(17.042,2.483)
  Signal Layer 6 w0.191: J1.26 4.398,10.75 5.026,10.122 5.026,8.027 6.328,6.725 13.275,6.725 17.042,2.958 v1(17.042,2.483)
GPIO11: J1.30 U1.40 | length 25.4
  Signal Layer 1 w0.191: U1.40@16.8,6.25 16.8,4.2 17.924,3.076 17.924,1.724 v1(17.9,1.7)
  Signal Layer 4 w0.191: v1(4.4,9.025) 4.4,7.05 5.221,6.229 5.221,4.61 7.558,2.273 8.421,1.409 17.001,1.409 17.232,1.641 17.841,1.641 v1(17.9,1.7)
  Signal Layer 6 w0.191: J1.30 3.255,9.695 3.752,9.695 4.4,9.047 v1(4.4,9.025)
GPIO12: J2.9 U1.41 | length 15.7
  Signal Layer 1 w0.191: U1.41@17.2,6.25 17.2,4.318 18.299,3.219 18.299,2.317 18.891,1.725 v1(18.975,1.725)
  Signal Layer 6 w0.191: v1(18.975,1.725) 18.975,1.729 19.548,2.302 19.548,2.648 24.455,7.555 24.455,9.002 24.648,9.195 25.145,9.195 J2.9
GPIO13: J2.13 U1.42 | length 14.8
  Signal Layer 1 w0.191: U1.42@17.6,6.25 17.6,4.4 18.891,3.109 18.891,2.609 v1(18.949,2.551)
  Signal Layer 6 w0.191: v1(18.949,2.551) 23.999,7.601 23.999,9.545 24.455,10.001 ; 24.455,10.002 24.648,10.195 25.145,10.195 J2.13
GPIO14: J2.17 U1.43 | length 21.4
  Signal Layer 1 w0.191: U1.43@18,6.25 18,4.482 19.677,2.805 19.677,2.207 20.1,1.784 v1(20.1,1.7) ; v1(23.074,5.227) 25.602,5.227 27.036,6.661 27.036,9.956 27.375,10.295 v1(27.375,10.379)
  Signal Layer 6 w0.191: v1(20.1,1.7) 20.053,1.747 20.053,2.572 21.351,3.87 21.654,3.87 23.011,5.227 v1(23.074,5.227) ; J2.17 25.214,11.236 25.995,11.236 26.421,10.81 26.999,10.81 27.375,10.434 v1(27.375,10.379)
GPIO15: J2.21 U1.44 | length 23.8
  Signal Layer 1 w0.191: U1.44@18.4,6.25 18.4,4.666 v1(20.697,2.368) ; v1(26.35,2.925) 28.349,4.924 28.349,10.645 27.896,11.099 v1(27.896,11.182)
  Signal Layer 6 w0.191: v1(20.697,2.368) 20.697,2.322 21.469,1.551 24.976,1.551 v1(26.35,2.925) ; J2.21 26.828,12.25 v1(27.896,11.182)
HARD_RESET: J2.22 U1.60 | length 8
  Signal Layer 1 w0.191: U1.60 22.753,10.925 22.973,11.145 24.777,11.145 25.113,10.81 26.917,10.81 27.268,11.161 27.268,11.568 v1(27.85,12.15)
  Signal Layer 6 w0.191: v1(27.85,12.15) 27.9,12.2 28.75,12.2 J2.22
NetSB2_1: SB2.1 U1.71 | length 6.9
  Signal Layer 1 w0.191: U1.71 22.801,15.325 23.251,14.875 v1(23.275,14.875) ; v1(23.3,16.525) 23.279,16.546 23.279,20.164 23.3,20.185 SB2.1
  Signal Layer 6 w0.191: v1(23.275,14.875) 23.287,14.887 23.287,16.513 v1(23.3,16.525)
NetSB3_1: SB3.1 U1.61 | length 5.2
  Signal Layer 1 w0.191: U1.61@21.875,11.325 22.671,11.325 22.871,11.525 25.938,11.525 SB3.1
RF_IN: C2.2 R1.2 U1.15 | length 4.6
  Signal Layer 1 w0.191: R1.2 7.3,12.7 ; 7.301,12.7 cw(c7.299,12.509) 7.438,12.64 ccw(c7.875,13.05) 7.446,12.632 cw(c7.309,12.499) 7.5,12.501 7.5,12.5 C2.2 cw(c7.729,11.001) 7.729,11.325 U1.15
RSRX: J2.29 U1.47 | length 17.5
  Signal Layer 1 w0.191: U1.47@19.6,6.25 19.6,4.911 20.607,3.904 21.81,3.904 22.137,3.576 v1(22.137,3.505) ; v1(23.221,10.546) 23.221,10.514 23.999,9.736 23.999,6.236 23.8,6.036 v1(23.8,5.953)
  Signal Layer 6 w0.191: v1(22.137,3.505) 22.2,3.505 23.8,5.105 v1(23.8,5.953) ; v1(23.221,10.546) 23.304,10.546 23.9,11.142 23.9,13.447 24.648,14.195 25.145,14.195 J2.29
RSTX: J2.25 U1.46 | length 18.6
  Signal Layer 1 w0.191: U1.46@19.2,6.25 19.2,4.829 20.466,3.563 21.232,3.563 22.37,2.425 22.76,2.425 v1@22.785,2.4 ; v1(24.094,10.489) 24.586,9.996 24.586,6.306 v1(24.598,6.294)
  Signal Layer 6 w0.191: v1(22.8,2.4) 22.859,2.459 22.859,3.081 23,3.222 23,3.824 24.553,5.377 24.553,6.248 v1(24.598,6.294) ; v1(24.094,10.489) 24.15,10.544 24.15,10.91 24.241,11.001 24.241,12.787 24.648,13.195 25.145,13.195 J2.25
SENSOR_EXT_IN: J2.26 U1.54 | length 9.9
  Signal Layer 1 w0.191: U1.54 21.902,8.523 22.397,8.523 22.861,8.059 23.341,8.059 v1(23.4,8)
  Signal Layer 3 w0.191: v1(23.4,8) 25.138,9.738 25.138,10.738 v1(27.7,13.3)
  Signal Layer 6 w0.191: v1(27.7,13.3) 27.75,13.25 J2.26
SENSOR_LDO_OUTPUT: T1.1 U1.53 | length 9.6
  Signal Layer 1 w0.191: U1.53 21.902,8.123 22.315,8.123 22.716,7.722 22.716,7.284 v1(22.775,7.225)
  Signal Layer 3 w0.191: v1(22.775,7.225) 24.875,7.225 27.8,4.3 T1.1
pads on no net: J2.30 U1.1 U1.2 U1.3 U1.6 U1.7 U1.8 U1.9 U1.10 U1.12 U1.13 U1.18 U1.19 U1.20 U1.21 U1.22 U1.23 U1.24 U1.25 U1.51 U1.52 U1.56 U1.57 U1.63 U1.64 U1.65 U1.66 U1.67 U1.68 U1.70 U1.73 U1.74 U1.75 U1.76 U1.77 U1.78 U1.79 U1.80 U1.81 U1.82 U1.83 U1.84 U1.85 U1.86 U1.87 U1.88 U1.91 U1.92 U1.93 U1.94 U1.95 U1.96 U1.97 U1.98 U1.99 U1.100

## Polygon pours and split planes (outlines as drawn)
+1.8V_SCUM on Signal Layer 5 "SL5_1V8" (solid, remove dead copper, pour order 6): 0.4,25.842 0.4,0.425 31.875,0.425 31.875,25.757
GND on Signal Layer 1 "SL1_GND" (solid, remove dead copper, pour order 3): 0,25.1 32,25.1 32,0 0,0
+1.1V_SCUM on Signal Layer 2 "SL2_1V1" (solid, remove dead copper, pour order 4): 0.3,25.042 0.3,0.3 31.775,0.3 31.775,24.957
GND on Signal Layer 4 "SL4_GND" (solid, remove dead copper, pour order 5): 0.45,24.943 0.45,0.275 31.925,0.275 31.925,24.858
GND on Signal Layer 3 "SL3_GND" (solid, remove dead copper, pour order 7): 0.225,24.743 0.225,0.25 31.7,0.25 31.7,24.657
GND on Signal Layer 6 "SL6_GND" (solid, remove dead copper, pour order 8): 0.375,25.044 0.375,-0.025 31.85,-0.025 31.85,24.958

## Silkscreen, mask and mechanical layers (free items; w line width, h text height)
Top Overlay:
  rectangle: 12.6,21.4 20.7,23.9
  text "CATON-D-Q100" at 21.13,22.63 h0.8
  text "SN:" at 10.63,21.53 h0.8
  text "Rev.2" at 26.93,21.43 h0.8
Mechanical 7:
  lines w0.254: 1,1.7 ccw(c1.7,1.7) 1.7,1 ; 1,1.7 1.7,1 ; 1,1.7 1,23.5 ; 1,23.5 cw(c1.7,23.5) 1.7,24.2 ; 1,23.5 1.7,24.2 ; 1.7,1 30.3,1 ; 1.7,24.2 30.3,24.2 ; 30.3,1 ccw(c30.3,1.7) 31,1.7 ; 30.3,1 31,1.7 ; 30.3,24.2 cw(c30.3,23.5) 31,23.5 ; 30.3,24.2 31,23.5 ; 31,1.7 31,23.5